# Altium PCB GD32F0130C8T6核心板PCB图.PcbDoc
Units mil, origin at the board's own origin, x right, y up, seen from the top; angles counter-clockwise.
Board outline 2100 x 900 mil, 2 copper layers (Top Layer, Bottom Layer); 30 components, 47 nets, 161 pads, 0 vias.
Unrouted connection lines stored in the file: 100.
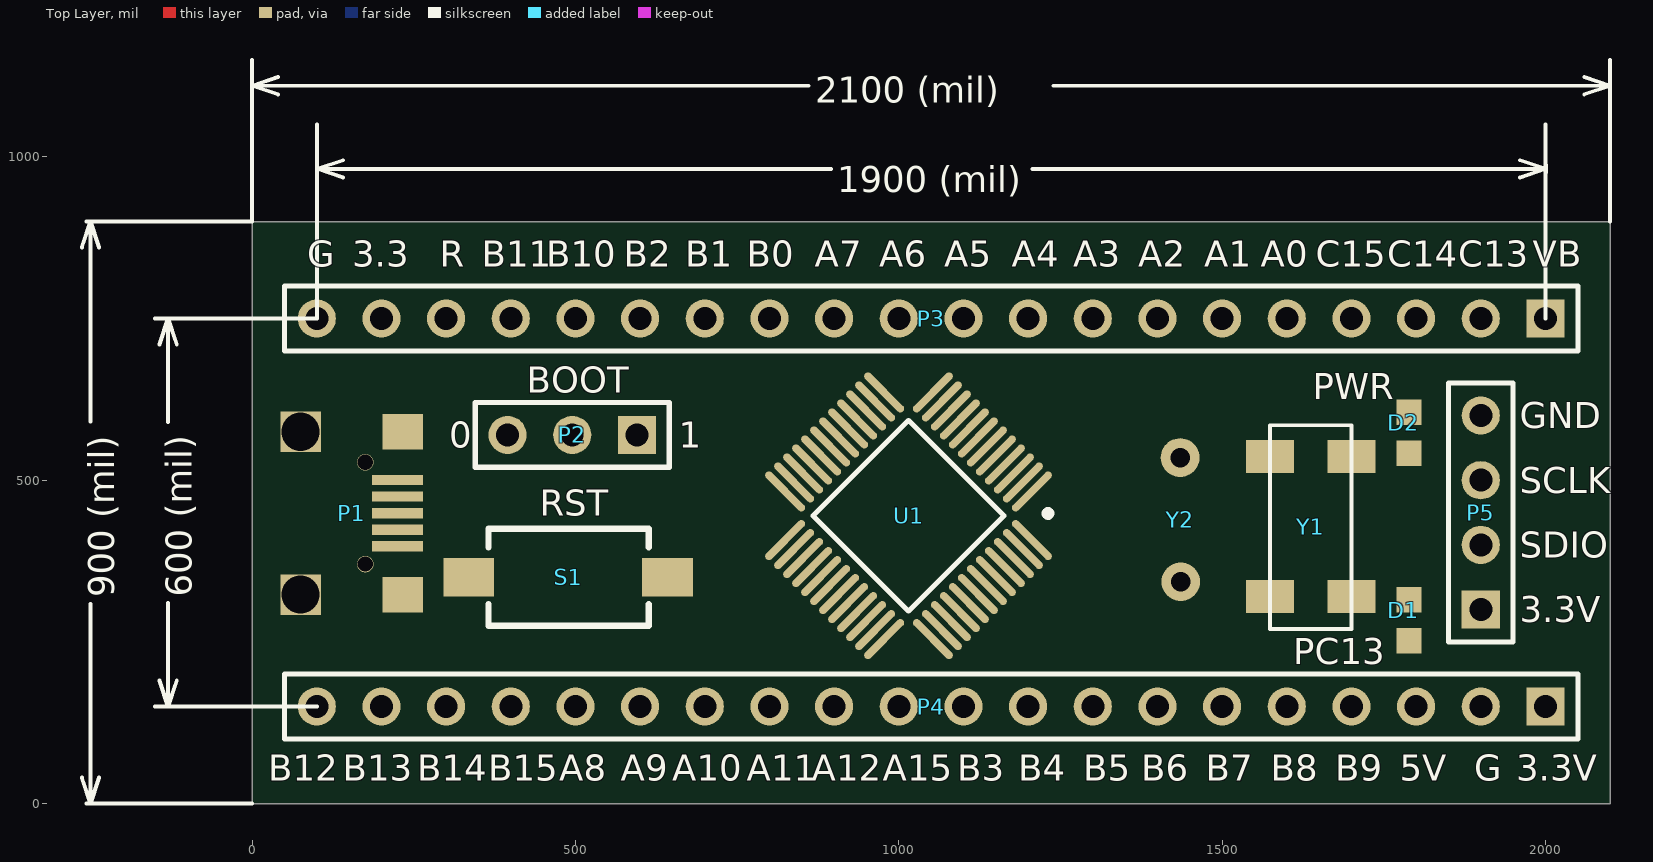
[diagram p0: Top Layer view]
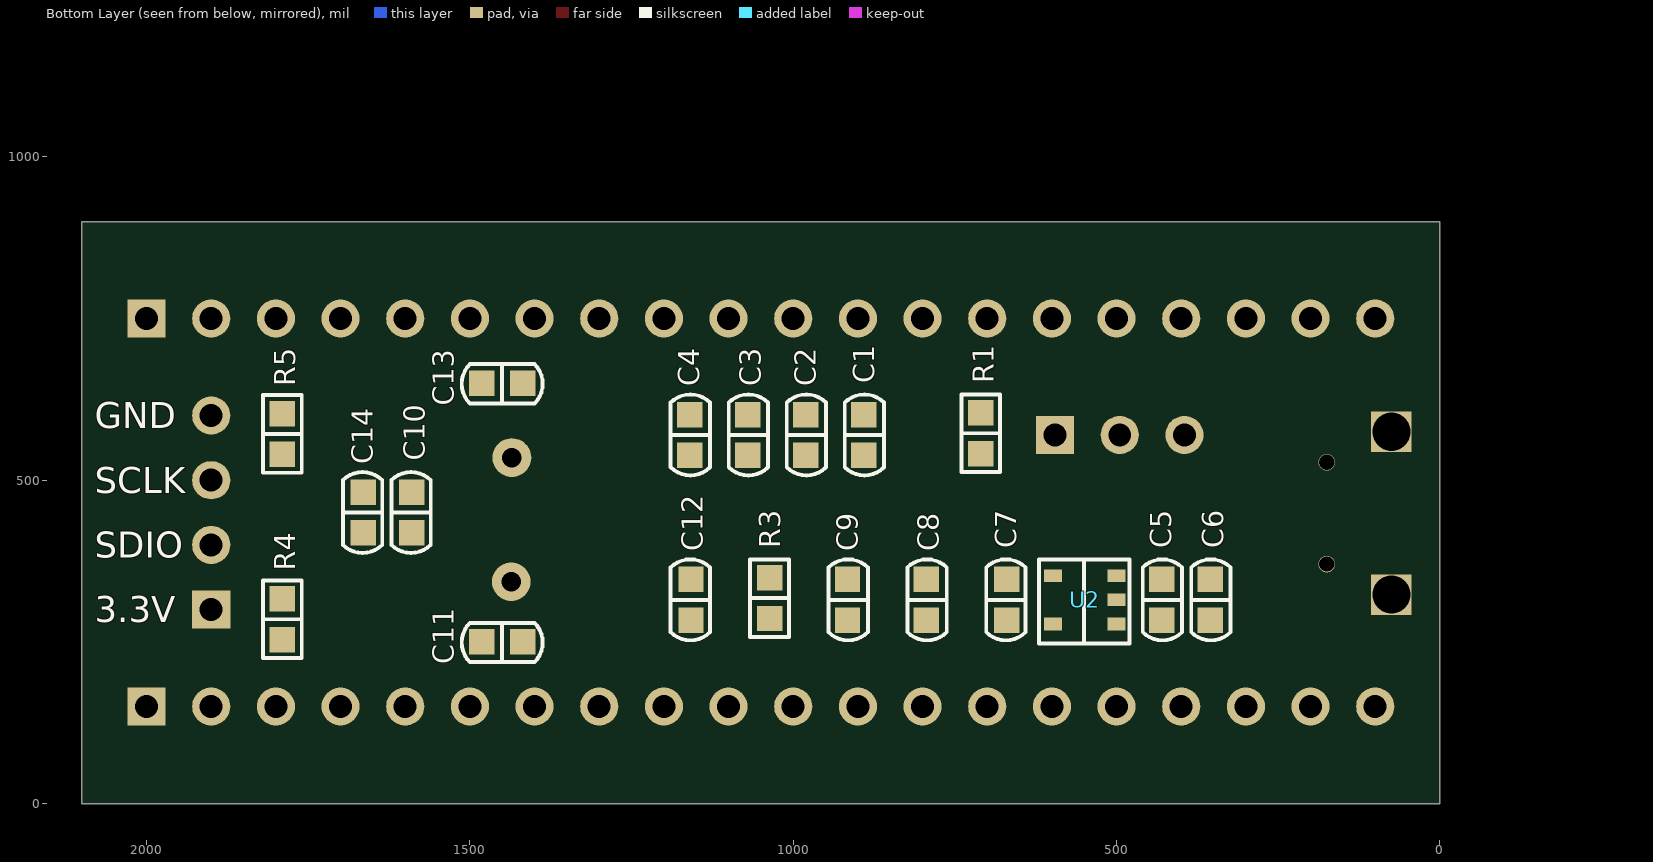
[diagram p1: Bottom Layer view, seen from below]

## Layer stack, top to bottom
Top Solder: solder mask 0.4, Solder Resist, Dk 3.5
Top Layer: signal copper 1.4
Dielectric 1: dielectric 12.6, FR-4, Dk 4.8
Bottom Layer: signal copper 1.4
Bottom Solder: solder mask 0.4, Solder Resist, Dk 3.5

## Board outline
0,0 2100,0 2100,900 0,900

## Design rules (kind name [scope] priority, off if disabled: settings)
Clearance [All] p1: gap=6
PolygonConnect [All] p1: connectstyle=Relief reliefconductorwidth=10 reliefentries=4 polygonreliefangle="90 Angle" airgapwidth=10
RoutingVias [All] p1: holewidth=28 width=50 viastyle="Through Hole" minholewidth=28 minwidth=50 maxholewidth=28 maxwidth=50
SolderMaskExpansion [All] p1: expansion=4
Width [All] p1: maxlimit=100 minlimit=6 preferedwidth=10
30 further rules are at their usual default settings.

## Components (designator, comment, footprint, x,y, rotation, side; value= is the part's Value field where it differs from the comment)
C1 "Cap 0603" R0603-R/C-Y 890.86,570 r270 bottom
C2 "Cap 0603" R0603-R/C-Y 980.57,570 r270 bottom
C3 "Cap 0603" R0603-R/C-Y 1070.29,570 r270 bottom
C4 "Cap 0603" R0603-R/C-Y 1160,570 r270 bottom
C5 "Cap 0603" R0603-R/C-Y 430,315 r270 bottom
C6 "Cap 0603" R0603-R/C-Y 355,315 r270 bottom
C7 "Cap 0603" R0603-R/C-Y 670,315 r90 bottom
C8 "Cap 0603" R0603-R/C-Y 794,315 r270 bottom
C9 "Cap 0603" R0603-R/C-Y 916,315 r270 bottom
C10 "Cap 0603" R0603-R/C-Y 1590,450 r90 bottom
C11 "Cap 0603" R0603-R/C-Y 1450,250 r0 bottom
C12 "Cap 0603" R0603-R/C-Y 1158,315 r90 bottom
C13 "Cap 0603" R0603-R/C-Y 1450,650 r0 bottom
C14 "Cap 0603" R0603-R/C-Y 1665,450 r90 bottom
D1 "LED 0603" 0603-LED-G 1788.94,283.31 r90 top
D2 "LED 0603" 0603-LED-G 1788.94,573.31 r90 top
P1 "USB-Micro" "USB Micro" 225,449 r90 top
P2 "Header 3" HDR1X3 595,570 r180 top
P3 "Header 20" HDR1X20 2000,750 r180 top
P4 "Header 20" HDR1X20 2000,150 r180 top
P5 "Header 4" HDR1X4 1900,300 r90 top
R1 "Res 0603" R0603-R/C-BY 710,572.61 r90 bottom
R3 "Res 0603" R0603-R/C-BY 1036.57,317.61 r270 bottom
R4 "Res 0603" R0603-R/C-BY 1790,285 r270 bottom
R5 "Res 0603" R0603-R/C-BY 1790,571.5 r270 bottom
S1 "SW_PB" SW-2Pin 642.09,350 r180 top
U1 "STM32F030C8T6" TQFP48_M 1015,445 r225 top
U2 "ME6211C33M5G SOT-23-5" SOT-23-5 500,277.61 r90 bottom
Y1 "XTAL_32.768K 8032" XTAL_8032 1700,320 r90 top
Y2 "XTAL" XTAL_49S 1437,465 r270 top

## Footprints (in the part's own frame and the unit in brackets; to place one, negate y for a bottom-side part, rotate by r counter-clockwise, add the part's x,y. Pads: shape width x height; smd on the part's side, far side on the other; paste and mask are expansions set on the pad)
0603-LED-G [mm]
  rect 1x1 smd: 1(-0.8,0) 2(0.8,0)
  round 0.2 on Top Overlay mask+0: 2(1.587,0.463)
  body extent -0.8,-0.39 0.85,0.33, height 0.68
HDR1X3 [mm] "Connector; Header; 3 Position"
  rect 1.5x1.5 hole 0.9: 1(0,0)
  round 1.5 hole 0.9: 2(2.54,0) 3(5.08,0)
  silkscreen extent -1.27,-1.27 6.35,1.27
HDR1X4 [mm] "Connector; Header; 4 Position"
  rect 1.5x1.5 hole 0.9: 1(0,0)
  round 1.5 hole 0.9: 2(2.54,0) 3(5.08,0) 4(7.62,0)
  silkscreen extent -1.27,-1.27 8.89,1.27
HDR1X20 [mm] "Connector; Header; 20 Position"
  rect 1.5x1.5 hole 0.9: 1(0,0)
  round 1.5 hole 0.9: 2(2.54,0) 3(5.08,0) 4(7.62,0) 5(10.16,0) 6(12.7,0) 7(15.24,0) 8(17.78,0) 9(20.32,0) 10(22.86,0) 11(25.4,0) 12(27.94,0) 13(30.48,0) 14(33.02,0) 15(35.56,0) 16(38.1,0) 17(40.64,0) 18(43.18,0) 19(45.72,0) 20(48.26,0)
  silkscreen extent -1.27,-1.27 49.53,1.27
R0603-R/C-BY [mm]
  rect 1x1 smd: 1(-0.8,0) 2(0.8,0)
  silkscreen extent -1.52,-0.76 1.52,0.76, body extent -0.97,-0.36 1.03,0.43, height 0.79
R0603-R/C-Y [mm]
  rect 1x1 smd: 1(-0.8,0) 2(0.8,0)
  silkscreen extent -1.59,-0.75 1.59,0.8, body extent -0.97,-0.36 1.03,0.43, height 0.79
SOT-23-5 [mm]
  rect 0.5x0.7 smd: 1(0,0) 2(0.95,0) 3(1.9,0) 4(1.9,2.5) 5(0,2.5)
  silkscreen extent -0.76,-0.51 2.54,3.05, body extent -0.61,0.02 2.39,2.52, height 1.05
SW-2Pin [mm]
  rect 2x1.5 smd: 1(0,0) 2(7.8,0)
  silkscreen extent 0.73,-1.9 7.03,1.9, body extent -0.06,-1.94 7.83,1.91, height 2.5
TQFP48_M [mm] "48-Pin Thin Quad Flat Pack 0.5 mm Pitch, IPC Low Density"
  oval 2.1x0.3 smd: 1(-4.1,2.75) 2(-4.1,2.25) 3(-4.1,1.75) 4(-4.1,1.25) 5(-4.1,0.75) 6(-4.1,0.25) 7(-4.1,-0.25) 8(-4.1,-0.75) 9(-4.1,-1.25) 10(-4.1,-1.75) 11(-4.1,-2.25) 12(-4.1,-2.75) 25(4.1,-2.75) 26(4.1,-2.25) 27(4.1,-1.75) 28(4.1,-1.25) 29(4.1,-0.75) 30(4.1,-0.25) 31(4.1,0.25) 32(4.1,0.75) 33(4.1,1.25) 34(4.1,1.75) 35(4.1,2.25) 36(4.1,2.75)
  oval 0.3x2.1 smd: 13(-2.75,-4.1) 14(-2.25,-4.1) 15(-1.75,-4.1) 16(-1.25,-4.1) 17(-0.75,-4.1) 18(-0.25,-4.1) 19(0.25,-4.1) 20(0.75,-4.1) 21(1.25,-4.1) 22(1.75,-4.1) 23(2.25,-4.1) 24(2.75,-4.1) 37(2.75,4.1) 38(2.25,4.1) 39(1.75,4.1) 40(1.25,4.1) 41(0.75,4.1) 42(0.25,4.1) 43(-0.25,4.1) 44(-0.75,4.1) 45(-1.25,4.1) 46(-1.75,4.1) 47(-2.25,4.1) 48(-2.75,4.1)
  silkscreen extent -4.06,-2.65 2.65,3.93, body extent -4.5,-4.5 4.5,4.5, height 1.6
"USB Micro" [mm]
  rect 0.4x2 smd: 1(-1.3,0) 2(-0.65,0) 3(0,0) 4(0.65,0) 5(1.3,0)
  rect 1.6x1.6 hole 1.5: ""(-3.2,3.81) ""(3.2,3.81)
  rect 1.4x1.6 smd: ""(-3.2,-0.2) ""(3.2,-0.2)
  round 0.65 hole 0.6 unplated: ""(-2,1.27) ""(2,1.27)
  body extent -4.4,0.13 4.4,5.73, height 2.83
XTAL_49S [mil]
  round 60 hole 30: 1(-70,-2) 2(122,-1)
  body extent -197,-93 249,91, height 142
XTAL_8032 [mm]
  rect 1.3x1.9 smd: 1(0,0) 2(5.5,0) 3(5.5,3.2) 4(0,3.2)
  silkscreen extent -1.27,0 6.73,3.2, body extent -0.76,-0.03 6.34,3.07, height 1.3

## Part data
C1 C2 C3 C4 C5 C6 C7 C8 C9 C10 C11 C12 C13 C14: "Capacitor 0603"
P2: "Header, 3-Pin"
P3 P4: "Header, 20-Pin"
P5: "Header, 4-Pin"
R1 R3 R4 R5: "Resistor 0603"
U1: "STM32F030C8T6 LQFP48"
U2: library part ME6211C33M5G
Y2: library part "XTAL 8MHZ", "XTAL 8MHZ"

## Nets (pads, with @x,y where several pads share a name; then routed paths per layer and width w, separated by ;. In a path a pad name is that pad's centre, name@x,y a point inside that pad or via, vN(x,y) a via of type N, cw(c..) or ccw(c..) an arc to the next point about the centre after c; other vN are vias at no path point)
BOOT0: R1.1 U1.44
GND: C1.1 C2.1 C3.1 C4.1 C5.1 C6.1 C7.1 C8.1 C9.1 C10.2 C11.2 C12.1 C13.2 C14.2 D1.2@1788.94,314.8 P1.1 P1.2 P2.3 P3.20 P4.2 P5.4 S1.1 U1.8 U1.23 U1.47 U2.2
NetC7_2: C7.2 U2.4
NetD1_1: D1.1 R4.2
NetD2_1: D2.1 R5.2
NetP2_2: P2.2 R1.2
OSC_IN: C11.1 U1.5 Y2.2
OSC_OUT: C13.1 U1.6 Y2.1
PA0: P3.5 U1.10
PA1: P3.6 U1.11
PA2: P3.7 U1.12
PA3: P3.8 U1.13
PA4: P3.9 U1.14
PA5: P3.10 U1.15
PA6: P3.11 U1.16
PA7: P3.12 U1.17
PA8: P4.16 U1.29
PA9: P4.15 U1.30
PA10: P4.14 U1.31
PA11: P4.13 U1.32
PA12: P4.12 U1.33
PA15: P4.11 U1.38
PB0: P3.13 U1.18
PB1: P3.14 U1.19
PB2: P3.15 U1.20
PB3: P4.10 U1.39
PB4: P4.9 U1.40
PB5: P4.8 U1.41
PB6: P4.7 U1.42
PB7: P4.6 U1.43
PB8: P4.5 U1.45
PB9: P4.4 U1.46
PB10: P3.16 U1.21
PB11: P3.17 U1.22
PB12: P4.20 U1.25
PB13: P4.19 U1.26
PB14: P4.18 U1.27
PB15: P4.17 U1.28
PC13: D2.2@1788.94,604.8 P3.2 U1.2
PC14: C10.1 P3.3 U1.3 Y1.4
PC15: C14.1 P3.4 U1.4 Y1.1
RST: C12.2 P3.18 R3.1 S1.2 U1.7
SWCLK: P5.3 U1.37
SWDIO: P5.2 U1.34
VBAT: P3.1 U1.1
VCC_3V3: C1.2 C2.2 C3.2 C4.2 C8.2 C9.2 P2.1 P3.19 P4.1 P5.1 R3.2 R4.1 R5.1 U1.9 U1.24 U1.48 U2.5
VCC_5V: C5.2 C6.2 P1.5 P4.3 U2.1 U2.3
pads on no net: D1.2@1770.71,345.78 D2.2@1770.71,635.78 P1. P1.3 P1.4 U1.35 U1.36 Y1.2 Y1.3

## Silkscreen, mask and mechanical layers (free items; w line width, h text height)
Top Overlay:
  lines w6: -263.33,40 -250,0 ; -263.33,860 -250,900 ; -256,0 -244,0 ; -256,900 -244,900 ; -250,308.98 -250,0 ; -250,591.02 -250,900 ; -236.67,40 -250,0 ; -236.67,860 -250,900 ; -150,150 100,150 ; -150,750 100,750 100,1050 ; -143.33,190 -130,150 ; -143.33,710 -130,750 ; -136,150 -124,150 ; -136,750 -124,750 ; -130,310.03 -130,150 ; -130,589.97 -130,750 ; -116.67,190 -130,150 ; -116.67,710 -130,750 ; 0,0 -250,0 ; 0,1104 0,1116 ; 0,1150 0,900 -250,900 ; 40,1096.67 0,1110 ; 40,1123.33 0,1110 ; 100.68,975.47 100.68,987.47 ; 140.68,968.14 100.68,981.47 ; 140.68,994.8 100.68,981.47 ; 860.72,1110 0,1110 ; 895,981.47 100.68,981.47 ; 1206.37,981.47 2000.68,981.47 ; 1239.28,1110 2100,1110 ; 1960.68,968.14 2000.68,981.47 ; 1960.68,994.8 2000.68,981.47 ; 2000,750 2000,1050 ; 2000.68,975.47 2000.68,987.47 ; 2060,1096.67 2100,1110 ; 2060,1123.33 2100,1110 ; 2100,900 2100,1150 ; 2100,1104 2100,1116
  text "2100 (mil)" at 870.72,1084.01 h40
  text "1900 (mil)" at 905,945 h40
  text "G" at 85,830 h40
  text "3.3" at 155,830 h40
  text "R" at 290,830 h40
  text "B11" at 355,830 h40
  text "B10" at 455,830 h40
  text "B2" at 575,830 h40
  text "B1" at 670,830 h40
  text "B0" at 765,830 h40
  text "A7" at 870,830 h40
  text "A6" at 970,830 h40
  text "A5" at 1070,830 h40
  text "A4" at 1175,830 h40
  text "A3" at 1270,830 h40
  text "A2" at 1370,830 h40
  text "A1" at 1472.63,830 h40
  text "A0" at 1560,830 h40
  text "C15" at 1645,830 h40
  text "C14" at 1755,830 h40
  text "C13" at 1865,830 h40
  text "VB" at 1980,830 h40
  text "BOOT" at 425,635 h40
  text "PWR" at 1640,625 h40
  text "GND" at 1960,580 h40
  text "0" at 305,550 h40
  text "1" at 660,550 h40
  text "SCLK" at 1960,480 h40
  text "RST" at 445,445 h40
  text "SDIO" at 1960,380 h40
  text "600 (mil)" at -93.53,320.03 h40 r90
  text "900 (mil)" at -213.53,318.98 h40 r90
  text "3.3V" at 1960,280 h40
  text "PC13" at 1610,215 h40
  text "B12" at 25,35 h40
  text "B13" at 140,35 h40
  text "B14" at 255,35 h40
  text "B15" at 365,35 h40
  text "A8" at 475,35 h40
  text "A9" at 570,35 h40
  text "A10" at 650,35 h40
  text "A11" at 765,35 h40
  text "A12" at 865,35 h40
  text "A15" at 975,35 h40
  text "B3" at 1090,35 h40
  text "B4" at 1185,35 h40
  text "B5" at 1285,35 h40
  text "B6" at 1375,35 h40
  text "B7" at 1475,35 h40
  text "B8" at 1575,35 h40
  text "B9" at 1675,35 h40
  text "5V" at 1775,35 h40
  text "G" at 1890,35 h40
  text "3.3V" at 1955,35 h40
Bottom Overlay:
  text "GND" at 2080,580 h40
  text "SCLK" at 2080,480 h40
  text "SDIO" at 2080,380 h40
  text "3.3V" at 2080,280 h40
Mechanical 1:
  the board outline again, w6